# Altium PCB PTW_SENS_V1.PcbDoc
Units mm, origin at the board's own origin, x right, y up, seen from the top; angles counter-clockwise.
Board outline 12.3 x 12.3 mm, 2 copper layers (Top Layer, Bottom Layer), stack 0.771 mm thick; 6 components, 4 nets, 13 pads, 0 vias.
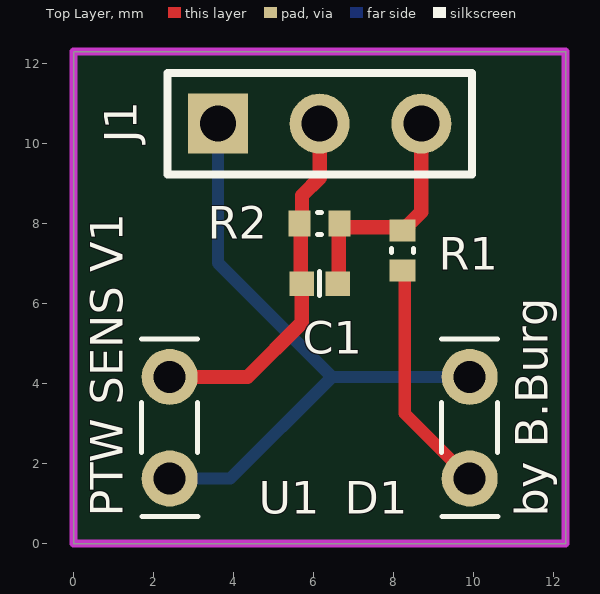
[diagram p0: Top Layer view]
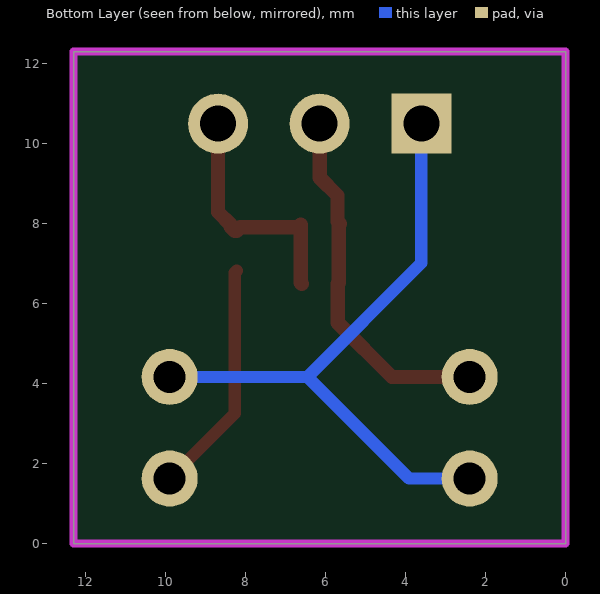
[diagram p1: Bottom Layer view, seen from below]

## Layer stack, top to bottom
Top Solder: solder mask 0.0102, Solder Resist, Dk 3.5
Top Layer: signal copper 0.0356
Dielectric 1: dielectric 0.7, FR-4, Dk 4.8
Bottom Layer: signal copper 0.0356
Bottom Solder: solder mask 0.0102, Solder Resist, Dk 3.5

## Board outline
0,0 12.3,0 12.3,12.3 0,12.3

## Design rules (kind name [scope] priority, off if disabled: settings)
Clearance [All] p1: gap=0.152 ignorepadtopadclearanceinfootprint=FALSE
ComponentClearance [All] p1: gap=0 collisioncheckmode=3 verticalgap=0 showdistances=FALSE
PolygonConnect [All] p1: connectstyle=Relief reliefconductorwidth=0.254 reliefentries=4 polygonreliefangle="90 Angle" airgapwidth=0.254
RoutingVias [All] p1: holewidth=0.711 width=1.27 viastyle="Through Hole" minholewidth=0.711 minwidth=1.27 maxholewidth=0.711 maxwidth=1.27
SolderMaskExpansion [All] p1: expansion=0.025
Width [All] p1: maxlimit=2.54 minlimit=0.127 preferedwidth=0.356
29 further rules are at their usual default settings.

## Components (designator, comment, footprint, x,y, rotation, side; value= is the part's Value field where it differs from the comment)
C1 "100nF" CAPC0402(1005)60_N 6.15,6.5 r180 top
D1 "IRL80A" IRL80A 9.9,2.9 r270 top locked
J1 "Pin1x3" HDR1X3 3.61,10.5 r0 top locked
R1 "RES_0402" RESC0402(1005)_N 8.225,7.325 r270 top value=680R
R2 "RES_0402" RESC0402(1005)_N 6.15,8 r180 top value=10k
U1 "LPT80A" LPT80A 2.4,2.9 r90 top locked

## Footprints (in the part's own frame and the unit in brackets; to place one, negate y for a bottom-side part, rotate by r counter-clockwise, add the part's x,y. Pads: shape width x height; smd on the part's side, far side on the other; paste and mask are expansions set on the pad)
CAPC0402(1005)60_N [mm] "Chip Capacitor, Body 1.0x0.5mm, Height 0.6mm, IPC Medium Density"
  rect 0.62x0.62 smd: 1(-0.45,0) 2(0.45,0)
  Top Layer pour cut-out: -0.1,0.325 0.1,0.325 0.1,-0.325 -0.1,-0.325
  silkscreen extent 0,-0.3 0,0.3, body extent -0.55,-0.3 0.55,0.3, height 0.6
HDR1X3 [mm] "Connector; Header; 3 Position"
  rect 1.5x1.5 hole 0.9: 1(0,0)
  round 1.5 hole 0.9: 2(2.54,0) 3(5.08,0)
  silkscreen extent -1.27,-1.27 6.35,1.27
IRL80A [mm] "GaAs Infrared Emitter"
  round 1.4 hole 0.8: 1(-1.27,0) 2(1.27,0)
  silkscreen extent -2.22,-0.7 2.22,0.7, body extent -2.22,-1.59 2.22,0.7, height 5.76
LPT80A [mm] "Silicon NPN Phototransistor"
  round 1.4 hole 0.8: 1(-1.27,0) 2(1.27,0)
  silkscreen extent -2.22,-0.7 2.22,0.7, body extent -2.22,-1.59 2.22,0.7, height 5.76
RESC0402(1005)_N [mm] "Chip Resistor, Body 1.0x0.5mm, IPC Medium Density"
  rect 0.55x0.65 smd: 1(-0.5,0) 2(0.5,0)
  Top Layer pour cut-out: -0.175,0.3 0.175,0.3 0.175,-0.3 -0.175,-0.3
  silkscreen extent -0.05,-0.28 0.05,0.28, body extent -0.52,-0.27 0.53,0.28, height 0.4

## Part data
C1: library part CAPC_25V_X5R_0.47µF_0402, "Capacitor SMD Cer 0.47µF 10% 25V X5R 0402", Betriebstemperatur="-55°C bis 85°C", Manufacturer=TDK, Manufacturer Part Number=C1005X5R1E105K050BC, Package / Case="0402 (1005 metric)", Temperaturwirkungsgrad=X5R, Tolerance=10%, Dicke=0.55mm, Spannung - Nenn=25V
D1: "GaAs Infrared Emitter", Color=blue, Current=?, Package / Case="0402 (1005 metric)", Supplier Part Number 1=720-IRL80A, Abstrahlwinkel=180°, Brightness=?, Dicke=0.35mm, Spannung - Nenn=?, Supplier 1=Mouser, Supplier 2=Digi-Key, Supplier Part Number 2=475-1364-ND
J1: "Pinheader 1 Row 3Pins"
R1 R2: "R_0402", Manufacturer=?, Package / Case="0402 (1005 metric)", Ratings=1/10W, Tolerance=±?%, Manufacturer Part Number=?
U1: "Silicon NPN Phototransistor", Supplier Part Number 1=720-LPT80A, Supplier 1=Mouser, Supplier 2=Digi-Key, Supplier Part Number 2=475-1419-ND

## Nets (pads, with @x,y where several pads share a name; then routed paths per layer and width w, separated by ;. In a path a pad name is that pad's centre, name@x,y a point inside that pad or via, vN(x,y) a via of type N, cw(c..) or ccw(c..) an arc to the next point about the centre after c; other vN are vias at no path point)
LB: C1.2 J1.2 R2.2 U1.2 | length 9.1
  Top Layer w0.356: U1.2 4.345,4.17 5.7,5.525 C1.2 5.675,6.525 5.675,7.975 R2.2 5.706,8.056 5.706,8.706 6.15,9.15 J1.2
LB_GND: D1.1 J1.1 U1.1 | length 16.1
  Bottom Layer w0.305: U1.1 3.915,1.63 6.455,4.17 ; J1.1 3.61,7.015 6.455,4.17 ; D1.1 6.455,4.17
NetD1_2: D1.2 R1.2 | length 5.9
  Top Layer w0.305: R1.2 8.275,6.775 8.275,3.255 D1.2
VCC: C1.1 J1.3 R1.1 R2.1 | length 6
  Top Layer w0.356: C1.1 6.625,6.525 6.625,7.975 6.688,7.912 8.138,7.912 R1.1 8.275,7.825 8.372,7.922 8.372,7.972 8.69,8.29 J1.3

## Keep-outs
Keep-Out Layer:
  the board outline again, w0.2

## Silkscreen, mask and mechanical layers (free items; w line width, h text height)
Top Overlay:
  text "PTW SENS V1" at 1.225,0.675 h0.81 r90
  text "by B.Burg" at 11.85,0.675 h0.81 r90